# Altium PCB Main.PcbDoc (part 2 of 4)
Units mm, origin at the board's own origin, x right, y up, seen from the top; angles counter-clockwise.
Board outline 172.29 x 85.1 mm, 6 copper layers (Component Side, Ground Plane, Signal Layer 1, Signal Layer 2, Power Plane, Solder Side), stack 1.297 mm thick; 277 components, 256 nets, 1030 pads, 416 vias.
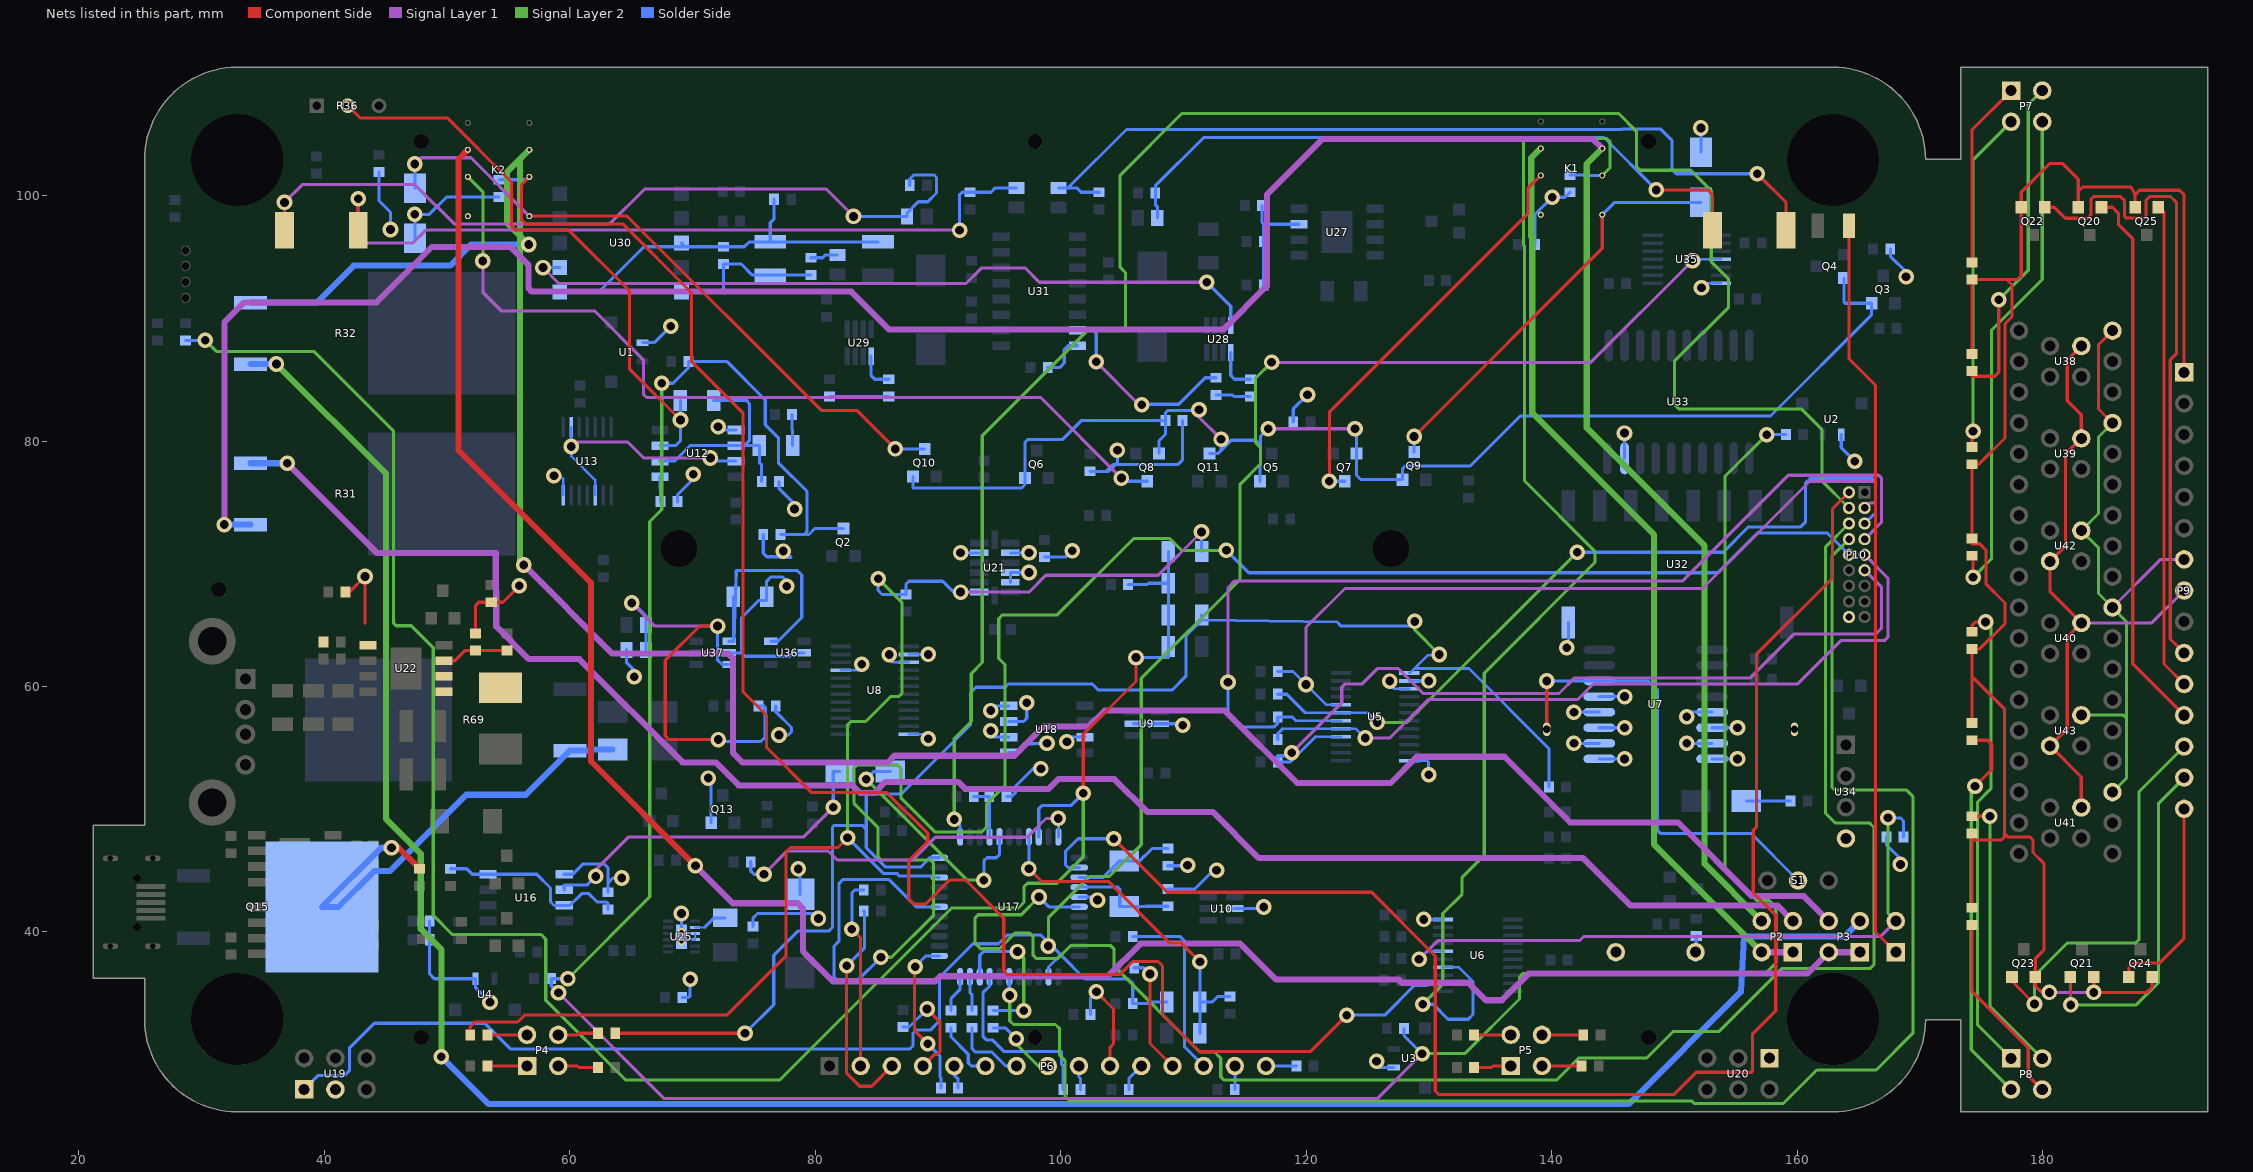
[diagram p6: the nets of this part, all layers, seen from the top]

## Via types
v1: diameter 1.27, hole 0.711, Component Side to Solder Side, tented both sides, 407 vias
v2: diameter 0.66, hole 0.33, Component Side to Solder Side, 8 vias
v3: diameter 1.27, hole 0.711, Component Side to Solder Side, 1 vias

## Nets (pads, with @x,y where several pads share a name; then routed paths per layer and width w, separated by ;. In a path a pad name is that pad's centre, name@x,y a point inside that pad or via, vN(x,y) a via of type N, cw(c..) or ccw(c..) an arc to the next point about the centre after c; other vN are vias at no path point) (continued)
C_EXT_INT: D18.2 P7.4 | length 41.3
  Component Side w0.254: D18.2@174.244,70.66 174.32,70.66 v1(174.32,68.91)
  Signal Layer 2 w0.254: v1(174.32,68.91) 175.819,70.409 175.819,89.027 179.955,93.163 P7.4@179.955,106.01
C_F: P9.7 U38.10 U39.10 U40.10 U41.10 U42.4 U43.4 | length 52.8
  Component Side w0.254: U39.10@185.674,81.469 184.531,82.612 184.531,87.844 U38.10@185.674,88.987
  Signal Layer 1 w0.254: U40.10@185.674,66.432 189.6,70.358 P9.7@191.516,70.358
  Signal Layer 2 w0.254: U43.4@183.134,57.663 186.558,57.663 186.817,57.404 ; U41.10@185.674,51.395 186.817,52.538 186.817,57.404 ; U39.10@185.674,81.469 184.531,80.326 184.531,74.097 U42.4@183.134,72.7 184.531,71.303 184.531,67.575 U40.10@185.674,66.432 186.817,65.289 186.817,57.404
C_FUSE0_LED: D19.2 P8.1 | length 39
  Component Side w0.254: D19.2@174.244,64.468 174.244,64.999 174.498,65.253 v1(175.336,65.253)
  Signal Layer 2 w0.254: v1(175.336,65.253) 175.768,64.821 175.768,51.661 174.676,50.569 174.676,32.439 P8.1@177.415,29.7
C_FUSE1_LED: D20.2 P8.3 | length 31.9
  Component Side w0.254: D20.2@174.244,55.617 175.514,55.617 175.844,55.287 175.844,53.238 v1(174.473,51.867)
  Signal Layer 2 w0.254: v1(174.473,51.867) 174.168,51.562 174.168,30.407 P8.3@177.415,27.16
C_G: P9.8 U38.9 U39.9 U40.9 U41.9 U42.9 U43.9 | length 52.2
  Component Side w0.254: U41.9@183.134,50.145 183.134,52.623 U43.9@180.594,55.163 181.991,56.56 181.991,64.039 U40.9@183.134,65.182 180.594,67.722 U42.9@180.594,70.2 181.864,71.47 181.864,78.949 U39.9@183.134,80.219 183.134,82.144 181.991,83.287 181.991,86.594 U38.9@183.134,87.737
  Signal Layer 1 w0.254: U40.9@183.134,65.182 188.88,65.182 P9.8@191.516,67.818
C_MPU_INT: D16.2 P7.2 | length 27.1
  Component Side w0.254: D16.2@174.244,85.702 174.244,85.28 176.097,85.28 176.415,85.598 v1(176.415,91.503)
  Signal Layer 2 w0.254: v1(176.415,91.503) 178.816,93.904 178.816,107.411 P7.2@179.955,108.55
C_POWER_INT: D15.2 P7.1 | length 15.3
  Component Side w0.254: D15.2@174.244,94.553 174.244,105.379 P7.1@177.415,108.55
C_REMOTE: D22.2 P8.4 | length 15.8
  Component Side w0.254: D22.2@174.244,40.575 174.244,35.128 178.816,30.556 178.816,28.299 P8.4@179.955,27.16
C_RTC_INT: D17.2 P7.3 | length 27.8
  Component Side w0.254: D17.2@174.244,79.511 174.244,80.721 v1(174.32,80.797)
  Signal Layer 2 w0.254: v1(174.32,80.797) 174.32,102.915 P7.3@177.415,106.01
C_S0: P9.15 Q24.2 | length 16.8
  Component Side w0.254: Q24.2@187.01,36.34 187.01,37.084 187.391,37.465 189.484,37.465 191.516,39.497 P9.15@191.516,50.038
C_S1: P9.14 Q21.2 | length 27.8
  Component Side w0.254: Q21.2@182.247,36.34 182.247,34.084 v1(182.27,34.061)
  Signal Layer 2 w0.254: v1(182.27,34.061) 187.604,34.061 189.433,35.89 189.433,50.495 P9.14@191.516,52.578
C_S2: P9.13 Q23.2 | length 32.3
  Component Side w0.254: Q23.2@177.485,36.34 177.485,35.977 v1(179.324,34.138)
  Signal Layer 2 w0.254: v1(179.324,34.138) 179.324,36.424 182.016,39.116 187.579,39.116 187.833,39.37 187.833,51.435 P9.13@191.516,55.118
C_S3: P9.12 Q20.2 | length 44.7
  Component Side w0.254: Q20.2@184.783,99.042 185.674,99.042 186.154,98.562 186.154,97.653 187.325,96.482 187.325,61.849 P9.12@191.516,57.658
C_S4: P9.11 Q25.2 | length 39.7
  Component Side w0.254: Q25.2@189.418,99.042 189.877,98.673 189.877,61.837 P9.11@191.516,60.198
C_S5: P9.10 Q22.2 | length 53.1
  Component Side w0.254: Q22.2@180.147,99.042 180.942,99.042 181.839,98.146 183.642,98.146 183.921,98.425 183.921,99.695 184.15,99.924 186.306,99.924 186.662,99.568 186.662,98.298 186.799,98.161 188.255,98.161 188.392,98.298 188.392,99.593 188.722,99.923 190.398,99.923 190.881,99.44 190.881,87.11 190.385,86.614 190.385,63.869 P9.10@191.516,62.738
C_TRIP_LED: D21.2 P8.2 | length 22.9
  Component Side w0.254: D21.2@174.244,49.426 v1(175.692,49.426)
  Signal Layer 2 w0.254: v1(175.692,49.426) 175.692,33.963 P8.2@179.955,29.7
C_VCC_MCU: D15.1 D16.1 D17.1 D18.1 D19.1 D20.1 D21.1 D22.1 P9.1 Q20.3 Q21.3 Q22.3 Q23.3 Q24.3 Q25.3 | length 141.4
  Component Side w0.254: D22.1@174.244,41.975 174.244,47.625 ; D21.1@174.244,48.026 174.244,47.625 ; D20.1@174.244,57.017 174.244,60.782 ; D16.1@174.244,87.102 D15.1@174.244,93.153 177.052,93.153 ; v1(180.538,35.077) 179.903,35.077 179.385,35.595 Q23.3@179.385,36.34 179.385,37.821 180.086,38.522 180.086,45.593 179.197,46.482 179.197,47.498 178.943,47.752 177.14,47.752 176.886,48.006 ; Q20.3@182.882,99.042 182.882,100.33 ; v1(184.148,35.077) v1@184.148,35.334 ; Q21.3@184.148,36.34 v1@184.148,35.334 ; Q25.3@187.518,99.042 187.518,100.076 ; Q24.3@188.91,36.34 188.91,35.519 188.468,35.077 184.404,35.077 v1@184.148,35.334 ; P9.1@191.516,85.598 191.516,100.051 191.136,100.431 187.873,100.431 187.518,100.076 ; 174.244,47.625 174.371,47.498 176.632,47.498 176.886,47.752 176.886,48.006 ; 174.244,60.782 176.886,58.141 176.886,48.006 ; 174.244,60.782 D19.1@174.244,63.068 174.873,63.068 176.923,65.119 176.923,66.802 175.362,68.363 175.362,71.12 174.854,71.628 174.244,71.628 D18.1@174.244,72.06 D17.1@174.244,78.111 174.783,78.111 176.923,80.251 176.923,89.547 177.495,90.119 177.495,92.71 177.052,93.153 ; 177.052,93.153 177.928,93.153 178.247,93.472 Q22.3@178.247,99.042 178.247,100.272 180.591,102.616 181.587,102.616 182.882,101.321 182.882,100.33 ; 182.882,100.33 183.232,100.68 187.198,100.68 187.518,100.076
  Signal Layer 1 w0.254: v1(180.538,35.077) v1(184.148,35.077)
D: R94.2 U17.34 | length 13.1
  Component Side w0.254: v1(88.138,37.178) 88.087,37.127 88.087,31.953 v1(89.154,30.886)
  Solder Side w0.254: v1(88.138,37.178) 89.012,38.052 U17.34@90.096,38.052 ; v1(89.154,30.886) 90.17,29.87 90.17,28.176 90.232,28.114 R94.2@90.232,27.305
DP: R100.1 U17.30 | length 15.1
  Solder Side w0.254: U17.30@94.196,36.352 94.196,35.598 93.65,35.052 93.65,31.496 93.929,31.217 94.412,31.217 95.352,30.277 100.013,30.277 100.064,30.226 100.064,29.219 100.2,29.083 R100.1@100.2,27.178
E: R93.2 U17.33 | length 3.1
  Solder Side w0.254: R93.2@91.059,33.593 91.059,34.595 91.796,35.332 U17.33@91.796,36.352
EXT_INT: D4.2 R10.1 R108.1 U5.1 U17.44 | length 124.5
  Component Side w0.254: R108.1@63.692,31.75 v1(74.27,31.75)
  Signal Layer 2 w0.254: v1(128.829,65.303) 128.829,64.618 v1(130.835,62.611)
  Solder Side w0.21: U5.1@128.378,61.106 128.448,61.106 128.81,61.468 ; v1@130.759,62.535 129.877,62.535 128.81,61.468 ; 133.248,61.468 128.81,61.468
  Solder Side w0.254: v1(74.27,31.75) 76.606,34.087 76.606,38.1 78.578,40.072 81.084,40.072 81.398,40.386 81.398,48.556 81.534,48.692 83.82,48.692 84.15,48.362 ; U17.44@90.096,46.052 89.332,46.052 88.561,45.281 85.739,45.281 84.15,46.87 84.15,48.362 ; D4.2@111.459,65.828 D4.2@111.459,65.405 ; v1(128.829,65.303) 128.448,64.922 122.834,64.922 122.504,65.253 D4.2@111.459,65.405 ; v1@130.759,62.535 v1(130.835,62.611) ; 133.248,61.468 139.762,54.954 R10.1@139.762,51.816 ; 84.15,48.362 84.15,51.119 84.277,51.246 87.009,51.246 92.634,56.871 92.634,59.49 93.087,59.943 95.441,59.943 95.696,60.198 102.582,60.198 103.073,59.707 109.052,59.707 110.211,60.865 110.211,64.157 D4.2@111.459,65.405
F: R98.1 U17.32 | length 2.8
  Solder Side w0.254: U17.32@92.596,36.352 92.596,35.052 92.773,34.874 R98.1@92.773,33.593
FUSE_POWER: C2.2 Q3.3 Q4.3 Q5.3 Q6.3 Q7.3 Q8.3 Q9.3 Q10.3 Q11.1 | length 109.9
  Signal Layer 1 w0.254: v1(111.252,82.55) 111.252,82.144 111.15,82.042 v1(113.055,80.137) ; v1(116.888,81.001) v1(123.962,81.001)
  Solder Side w0.254: Q10.3@87.95,77.107 87.95,76.2 87.97,76.18 96.809,76.18 97.084,76.454 Q6.3@97.084,76.98 97.084,79.913 97.282,80.112 100.101,80.112 101.651,81.661 C2.2@108.52,81.661 ; Q8.3@107.991,78.976 107.991,80.035 108.52,80.565 C2.2@108.52,81.661 ; v1(111.252,82.55) 111.194,82.492 108.705,82.492 108.52,82.307 C2.2@108.52,81.661 ; Q11.1@112.111,78.976 112.783,78.976 113.055,79.248 ; v1(113.055,80.137) 113.055,79.248 ; Q5.3@116.23,76.726 116.23,77.986 116.251,78.006 116.251,79.685 ; v1(116.888,81.001) 116.251,80.363 116.251,79.685 ; v1(123.962,81.001) 124.089,80.874 Q7.3@124.089,78.976 124.089,77.216 124.452,76.853 Q9.3@127.828,76.853 127.828,77.724 128.082,77.978 133.375,77.978 137.439,82.042 157.81,82.042 166.055,90.287 Q3.3@166.055,91.222 163.895,91.222 163.812,91.305 Q4.3@163.812,93.284 ; 113.055,79.248 113.868,80.061 115.875,80.061 116.251,79.685
G: R99.1 U17.31 | length 12.5
  Signal Layer 2 w0.254: v1(96.469,38.405) 96.977,37.897 v1(96.977,33.593)
  Solder Side w0.254: U17.31@93.396,36.352 93.396,38.1 93.701,38.405 v1(96.469,38.405) ; R99.1@94.488,33.593 v1(96.977,33.593)
GND: BT1.2 C1.1 C2.1 C3.1 C4.1 C5.1 C6.2 C7.1 C9.1 C10.1 C11.1 C14.1 C16.1 C17.2 C18.1 C37.1 C38.1 D6.1 D7.1 K1.7 K2.7 LS1.2 P10.18 Q13.1 R23.1 R24.1 R27.1 R29.1 R33.1 R34.1 R53.1 R63.1 R66.2 R67.1 R68.1 R84.1 R90.1 U1.1 U2.1 U3.1 U4.1 U5.2 U5.3 U5.12 U6.10 U7.5 U7.6 U7.7 U7.8 U7.9 U7.10 U7.11 U7.12 U7.13 U8.2 U8.3 U8.12 U8.21 U9.2 U9.5 U10.2 U12.1 U13.7 U16.1 U17.16 U18.1 U18.2 U18.3 U18.4 U18.7 U19.2 U20.1 U21.2 U21.4 U21.5 U21.12 U22.5 U25.3 U25.4 U25.13 U32.10 U33.9 U34.4 U35.7 U36.2 U37.2 | length 214.2
  Component Side w0.254: R68.1@41.721,67.691 42.037,67.691 v1(43.307,68.961) 43.307,65.151 ; C14.1@52.324,64.327 52.324,66.61 52.578,66.864 R67.1@53.594,66.864 54.556,66.864 55.88,68.188 v1(55.88,68.199)
  Solder Side w0.175: U25.13@69.088,39.37 69.897,39.37 69.901,39.374 U25.4@70.18,39.374 ; U25.4@70.188,39.374 U25.4@70.18,39.374 ; U25.3@70.188,39.874 70.18,39.874 U25.4@70.18,39.374
  Solder Side w0.21: v1(58.7,77.171) 59.208,77.171 59.462,76.917 U13.7@59.462,75.584 ; U8.21@82.061,61.315 83.521,61.315 v1@83.775,61.569 ; v1(86.024,62.6) 86.024,62.23 86.289,61.965 U8.3@87.611,61.965 ; U8.12@87.611,56.115 88.817,56.115 v1(89.198,55.734) ; U8.2@87.611,62.615 v1(89.198,62.615) ; v1(126.791,60.441) 126.791,60.198 127.183,59.806 U5.3@128.378,59.806 ; U5.12@128.378,53.956 129.838,53.956 129.965,53.829 ; v1(152.191,92.482) 152.572,92.863 U35.7@153.778,92.863
  Solder Side w0.254: R63.1@44.45,101.916 44.45,99.568 45.39,98.628 v1(45.39,97.231) ; D6.1@47.371,96.502 v1(47.371,98.464) 48.553,98.464 49.973,99.884 R34.1@54.229,99.884 ; C5.1@48.579,40.894 C7.1@48.579,39.37 48.579,36.576 48.96,36.195 U4.1@52.324,36.195 52.324,35.448 v1(53.492,34.28) ; U16.1@59.54,44.704 60.241,44.704 61.087,45.55 62.781,45.55 63.119,45.212 63.119,44.018 ; C6.2@63.119,43.245 63.119,44.018 ; v1(64.222,44.399) 63.5,44.399 63.119,44.018 ; R90.1@64.605,62.992 64.605,61.969 65.38,61.195 65.38,60.673 65.253,60.546 v1(65.253,60.8) ; U1.1@65.913,88.011 66.863,88.011 v1(68.209,89.357) ; C4.1@68.772,75.057 68.772,75.627 70.053,76.908 v1(70.053,77.303) ; U25.13@69.088,39.37 U25.13@69.088,39.624 v1(69.088,41.504) ; C16.1@69.153,34.671 69.672,34.671 69.799,34.798 v1(69.799,36.155) ; v1(71.272,52.537) 71.506,52.304 Q13.1@71.506,48.895 ; v1(72.075,81.153) 72.075,81.026 72.202,80.899 U12.1@73.537,80.899 ; U37.2@72.979,62.738 73.985,62.738 ; C18.1@74.93,40.451 74.93,41.148 75.286,41.504 79.843,41.504 v1(80.25,41.097) ; C1.1@75.754,72.39 75.754,70.862 76.048,70.569 v1@77.68,70.569 ; C38.1@76.773,58.42 76.773,57.937 78.054,56.656 78.054,56.301 77.8,56.047 v1(77.038,56.047) ; C3.1@77.027,76.708 77.027,76.138 78.308,74.857 v1(78.308,74.462) ; v1(77.394,71.033) 77.394,70.855 v1@77.68,70.569 ; v1(77.677,68.16) 77.677,68.58 77.335,68.922 76.368,68.922 76.026,68.58 C37.1@76.026,67.31 76.026,67.005 75.387,67.005 73.985,65.603 73.985,62.738 ; v1(78.613,45.14) 78.74,45.013 C17.2@78.74,43.078 ; U36.2@79.075,62.738 78.181,62.738 77.912,62.469 74.254,62.469 73.985,62.738 ; v1@83.775,61.569 v1(83.775,61.823) ; v1(91.833,70.891) U21.12@93.345,70.891 ; v1(94.296,56.388) 94.296,56.134 94.55,55.88 U18.2@95.758,55.88 ; v1(94.296,58.039) 94.677,58.42 U18.4@95.758,58.42 ; R53.1@95.569,51.054 96.001,51.054 96.291,51.344 96.291,51.858 97.733,53.3 v1(98.374,53.3) ; U18.1@95.758,54.61 96.596,54.61 96.85,54.864 96.85,55.154 97.028,55.332 97.815,55.332 97.855,55.372 v1(98.871,55.372) ; U18.3@95.758,57.15 96.966,57.15 97.22,57.404 v1(97.22,58.674) ; U21.5@95.89,68.491 95.885,68.491 95.885,69.291 U21.4@95.89,69.291 v1(97.402,69.291) ; U21.2@95.89,70.891 v1(97.402,70.891) ; C11.1@98.679,70.547 100.403,70.547 v1(100.925,71.069) ; v1(100.496,55.499) 100.496,55.753 100.623,55.88 U18.7@101.958,55.88 ; U17.16@101.496,42.852 102.729,42.852 v1(102.983,42.598) ; R29.1@102.362,77.532 103.694,77.532 ; v1(104.608,79.248) 104.608,78.25 104.437,78.08 ; U9.5@105.918,56.962 U9.2@108.068,56.962 109.809,56.962 v1(109.936,56.835) ; C10.1@108.712,43.499 110.896,43.499 112.431,45.034 v1(112.685,45.034) ; C9.1@108.712,45.401 109.839,45.401 109.878,45.441 v1(110.323,45.441) ; C2.1@109.92,81.661 109.92,78.486 109.514,78.08 104.437,78.08 ; U10.2@114.164,41.91 115.905,41.91 116.032,42.037 v1(116.54,42.037) ; R27.1@118.934,81.534 118.934,82.623 v1(120.091,83.78) ; v1(125.72,29.464) 125.72,29.21 125.974,28.956 U3.1@127.127,28.956 ; U5.2@128.378,60.456 v1(129.965,60.456) ; v1(129.573,41.025) U6.10@131.135,41.025 ; v1(129.965,52.813) 129.965,53.829 ; R84.1@138.622,96.012 138.622,98.45 v1(140.03,99.858) 141.071,99.858 R33.1@141.478,100.265 ; v1(141.224,63.165) 141.351,63.292 U32.10@141.351,65.227 ; v1(141.801,55.372) U7.10@143.863,55.372 ; v1(141.801,57.912) U7.12@143.863,57.912 ; U7.9@143.863,54.102 v1(145.925,54.102) ; U7.11@143.863,56.642 v1(145.925,56.642) ; U7.13@143.863,59.182 v1(145.925,59.182) ; U33.9@145.923,78.585 v1(145.923,80.647) ; v1(151.001,55.372) U7.7@153.063,55.372 ; v1(151.001,57.531) 151.382,57.912 U7.5@153.063,57.912 ; D7.1@152.146,103.541 v1(152.146,105.503) ; U7.8@153.063,54.102 v1(155.125,54.102) ; U7.6@153.063,56.642 v1(155.125,56.642) ; U2.1@163.576,80.518 163.576,79.441 v1(164.668,78.349) ; R24.1@167.256,47.752 167.256,47.115 168.402,45.969 v1(168.402,45.506) ; R23.1@167.578,95.631 167.578,95.061 168.859,93.78 v1(168.859,93.385) ; v1@77.68,70.569 77.724,70.525 78.029,70.525 77.985,70.569 v1@77.68,70.569 ; 103.694,77.532 104.242,78.08 104.437,78.08 ; 103.694,77.532 103.89,77.532 104.437,78.08
  other v2: 69.088,39.243 69.088,40.005
HG_POWER: C1.2 Q2.1 R3.2 R4.2 R5.2 R6.2 | length 242.4
  Signal Layer 1 w0.254: v1(59.07,35.04) 67.682,26.428 125.767,26.428 v1(129.427,30.088)
  Signal Layer 2 w0.254: v1(59.842,36.195) 66.511,42.864 66.511,73.447 67.488,74.424 v1(67.488,84.709) ; v1(129.427,30.088) 132.907,30.088 137.363,34.544 137.363,36.322 137.643,36.601 157.378,36.601 158.242,37.465 158.242,42.037 157.734,42.545 156.718,42.545 154.102,45.161 154.102,77.114 v1(157.505,80.518)
  Solder Side w0.254: v1(59.07,35.04) 58.485,35.625 R6.2@58.485,36.195 v1(59.842,36.195) ; v1(67.488,84.709) 68.402,84.709 69.661,85.968 R3.2@69.661,86.487 72.771,86.487 75.921,83.337 75.921,81.331 76.987,80.264 76.987,78.232 79.324,75.895 79.324,72.644 79.07,72.39 ; C1.2@77.154,72.39 79.07,72.39 ; Q2.1@82.296,72.88 79.967,72.88 79.477,72.39 79.07,72.39 ; R4.2@127.954,32.131 127.954,31.561 v1(129.427,30.088) ; v1(157.505,80.518) R5.2@159.066,80.518
INDICATOR_SW_OUT: U12.3 U13.3 U13.9 | length 20.6
  Signal Layer 1 w0.254: v1(60.112,79.553) 60.493,79.934 64.694,79.934 66.015,78.613 v1(71.45,78.613)
  Solder Side w0.21: U13.9@60.112,81.134 v1(60.112,79.553) 60.112,78.775 62.062,76.825 U13.3@62.062,75.584
  Solder Side w0.254: v1(71.45,78.613) 71.704,78.359 U12.3@73.537,78.359
KEY_INT: D11.1 D12.1 R55.1 U17.8 | length 28.1
  Component Side w0.254: v1(97.396,45.149) 98.423,44.122 103.858,44.122 108.886,39.094 109.804,39.094 v1(111.332,37.566)
  Solder Side w0.254: v1(97.396,45.149) U17.8@97.396,47.752 ; D12.1@111.332,31.75 D11.1@111.332,34.29 ; v1(111.332,37.566) D11.1@111.332,34.29 ; R55.1@113.792,34.736 112.765,34.736 112.319,34.29 D11.1@111.332,34.29
LIN: U28.8 U30.7 | length 61.3
  Signal Layer 1 w0.254: v1(57.81,94.132) 59.106,92.837 92.278,92.837 93.548,94.107 97.079,94.107 98.247,92.939 v1(111.887,92.939)
  Solder Side w0.254: v1(57.81,94.132) 57.817,94.139 U30.7@59.182,94.139 ; v1(111.887,92.939) 113.837,90.989 U28.8@113.837,89.408
LOUT: R79.1 U31.7 | length 16.1
  Signal Layer 1 w0.254: v1(102.88,86.451) 106.366,82.966 v1(106.588,82.966)
  Solder Side w0.254: U31.7@101.35,89.027 102.616,89.027 102.88,88.763 v1(102.88,86.451) ; v1(106.588,82.966) 106.622,83 109.605,83 111.76,85.155 R79.1@112.649,85.155
MCU_POWER_EN: R58.1 U17.11 | length 29.9
  Signal Layer 1 w0.254: v1(75.819,44.704) 77.724,46.609 81.026,46.609 81.763,45.872 87.935,45.872 89.777,47.715 97.257,47.715 98.793,49.251 v1(99.796,49.251)
  Solder Side w0.254: R58.1@74.741,45.72 74.741,44.958 74.995,44.704 v1(75.819,44.704) ; U17.11@99.796,47.752 v1(99.796,49.251)
MOD: D11.2 R57.2 U17.24 U19.1 U35.4 | length 183.1
  Signal Layer 1 w0.254: v1(117.17,86.411) 143.185,86.411 v1(151.46,94.686)
  Signal Layer 2 w0.254: v1(98.984,38.862) 98.984,41.148 102.364,44.528 103.964,44.528 106.553,47.117 106.553,60.662 114.605,68.713 114.605,76.479 116.251,78.125 116.251,79.477 115.859,79.868 115.859,85.1 v1(117.17,86.411)
  Solder Side w0.21: v1@151.587,94.813 U35.4@153.778,94.813
  Solder Side w0.254: U19.1@38.354,27.178 39.497,28.321 41.656,28.321 42.037,28.702 42.037,30.531 44.069,32.563 53.061,32.563 55.143,30.48 87.706,30.48 87.96,30.734 87.96,31.75 88.214,32.004 89.357,32.004 90.119,32.766 90.119,36.322 92.837,39.04 94.92,39.04 95.631,39.751 98.374,39.751 v1@99.123,39.002 ; v1(98.984,38.862) v1@99.123,39.002 ; U17.24@98.996,36.352 98.996,37.147 99.987,38.138 ; D11.2@108.632,34.29 107.29,34.29 107.163,34.163 R57.2@105.856,34.163 105.856,35.814 105.5,36.17 101.956,36.17 99.987,38.138 ; v1(151.46,94.686) v1@151.587,94.813 ; v1@99.123,39.002 99.987,38.138
MPU_INT: D2.2 R61.1 R106.2 U17.42 U21.8 | length 110.3
  Component Side w0.254: R106.2@51.878,31.623 51.878,32.258 52.284,32.664 55.753,32.664 56.34,33.252 72.825,33.252 77.597,38.024 77.597,46.507 77.978,46.888 81.839,46.888 v1(82.626,47.676)
  Signal Layer 1 w0.254: v1(91.833,67.691) 97.409,67.691 98.781,69.063 107.925,69.063 v1(111.455,72.593)
  Signal Layer 2 w0.254: v1(82.626,47.676) 82.626,56.896 82.88,57.15 84.099,57.15 86.131,59.182 86.792,59.182 87.046,59.436 87.046,66.853 v1(85.115,68.783)
  Solder Side w0.254: v1(82.626,47.676) 85.529,44.773 86.633,44.773 86.854,44.552 89.637,44.552 89.637,44.452 U17.42@90.096,44.452 ; v1(85.115,68.783) 85.115,67.818 85.431,67.502 R61.1@87.376,67.502 87.376,68.326 87.63,68.58 90.373,68.58 91.262,67.691 v1(91.833,67.691) U21.8@93.345,67.691 ; v1(111.455,72.593) 111.459,72.589 D2.2@111.459,70.993
NetBT1_1: BT1.1 S1.2 U7.14 | length 37.9
  Component Side w0.254: BT1.1@139.582,56.515 v1(139.582,60.452)
  Solder Side w0.254: v1(139.582,60.452) U7.14@143.863,60.452 147.879,60.452 148.59,59.741 148.59,48.285 148.844,48.031 156.225,48.031 S1.2@160.06,44.196
NetC3_2: C3.2 D8.2 D9.1 U12.2 U12.6 | length 18.2
  Solder Side w0.254: U12.6@67.337,78.359 68.529,78.359 69.799,79.629 U12.2@73.537,79.629 74.244,79.629 ; D8.2@71.708,83.312 74.371,83.312 74.625,83.058 74.625,80.01 74.244,79.629 ; C3.2@75.627,76.708 75.627,78.054 75.438,78.243 D9.1@75.438,79.629 74.244,79.629
NetC4_2: C4.2 U12.5 | length 2
  Solder Side w0.254: U12.5@67.337,77.089 67.337,76.083 67.372,76.048 C4.2@67.372,75.057
NetC6_1: C6.1 R44.2 U16.3 U16.8 | length 15.9
  Solder Side w0.254: R44.2@50.292,45.15 51.587,45.15 52.033,44.704 U16.8@53.34,44.704 57.298,44.704 58.418,43.583 58.418,42.458 58.713,42.164 U16.3@59.54,42.164 59.995,42.164 60.96,43.129 61.544,43.129 62.23,42.443 62.992,42.443 63.119,42.316 C6.1@63.119,41.845
NetC8_1: C8.1 R53.2 U17.4 | length 4.7
  Solder Side w0.254: C8.1@92.902,51.054 R53.2@93.942,51.054 ; R53.2@94.169,51.054 R53.2@93.942,51.054 ; U17.4@94.196,47.752 94.196,50.8 R53.2@93.942,51.054
NetC9_2: C9.2 U17.14 Y1.1 | length 8.2
  Solder Side w0.254: U17.14@101.496,44.452 103.46,44.452 104.8,45.792 Y1.1@105.156,45.792 106.426,45.792 107.435,46.801 C9.2@108.712,46.801
NetC10_2: C10.2 U17.15 Y1.2 | length 8.7
  Solder Side w0.254: U17.15@101.496,43.652 104.633,43.652 104.8,43.485 104.8,42.092 Y1.2@105.156,42.092 106.909,42.092 106.916,42.099 C10.2@108.712,42.099
NetC14_2: C14.2 R64.1 U22.3 | length 5.4
  Component Side w0.254: U22.3@49.757,62.103 50.622,62.103 51.446,62.927 C14.2@52.324,62.927 53.569,62.927 R64.1@54.864,62.927
NetC19_1: C19.1 R79.2 | length 2.8
  Solder Side w0.254: R79.2@112.649,83.755 113.97,83.755 114.097,83.628 C19.1@115.443,83.628
NetC19_2: C19.2 U28.1 | length 3.6
  Solder Side w0.254: U28.1@113.837,87.208 113.837,85.344 114.153,85.028 C19.2@115.443,85.028
NetC20_1: C20.1 R47.1 R48.2 U27.7 | length 9.5
  Solder Side w0.254: R48.2@116.397,99.187 116.397,97.79 116.524,97.663 116.524,97.347 ; C20.1@116.524,92.71 R47.1@116.524,96.266 116.524,97.347 ; U27.7@119.403,97.663 116.84,97.663 116.524,97.347
NetC23_1: C23.1 R81.2 | length 4.8
  Solder Side w0.254: R81.2@81.153,83.628 83.095,83.628 C23.1@85.979,83.628
NetC23_2: C23.2 U29.1 | length 3.1
  Solder Side w0.254: U29.1@84.541,86.911 84.541,85.323 84.836,85.028 C23.2@85.979,85.028
NetC24_2: C24.2 L3.2 LS2.2 | length 54.5
  Component Side w0.254: v1(148.514,100.457) 152.702,100.457 153.083,100.076 LS2.2@153.083,97.169
  Solder Side w0.254: L3.2@107.861,98.171 107.861,99.085 107.696,99.25 C24.2@107.696,100.203 107.696,100.787 111.633,104.724 144.247,104.724 v1(148.514,100.457)
NetC25_2: C25.2 L6.2 LS2.1 | length 70.1
  Component Side w0.254: v1(156.746,101.778) 159.083,99.441 LS2.1@159.083,97.169
  Solder Side w0.254: L6.2@99.822,100.622 100.584,100.622 ; C25.2@103.124,100.268 101.649,100.268 101.295,100.622 100.584,100.622 ; v1(156.746,101.778) 150.114,101.778 149.784,102.108 149.784,104.496 148.869,105.41 145.72,105.41 145.694,105.385 105.347,105.385 100.584,100.622
NetC26_1: C26.1 C27.1 C28.1 L10.2 U30.3 U30.6 | length 31.7
  Solder Side w0.254: U30.6@59.182,92.139 62.358,92.139 66.042,95.823 U30.3@69.404,95.823 ; U30.3@69.088,96.139 U30.3@69.404,95.823 ; L10.2@76.643,99.695 76.643,98.106 76.327,97.79 C28.1@76.327,96.219 ; C27.1@85.09,96.219 C28.1@76.327,96.219 ; U30.3@69.404,95.823 C26.1@72.517,95.823 74.219,95.823 74.615,96.219 C28.1@76.327,96.219
NetC26_2: C26.2 C28.2 R85.2 U30.5 | length 13
  Solder Side w0.254: U30.5@69.088,92.139 72.2,92.139 72.517,92.456 C26.2@72.517,94.423 73.965,94.423 74.869,93.519 C28.2@76.327,93.519 78.974,93.519 78.989,93.534 R85.2@79.629,93.534
NetC29_2: C29.2 L8.2 LS3.1 | length 63.2
  Component Side w0.254: LS3.1@42.751,97.169 v1(42.751,99.746)
  Signal Layer 1 w0.254: v1(42.751,99.746) 42.751,96.52 43.132,96.139 47.219,96.139 48.259,97.179 91.751,97.179 v1(91.752,97.18)
  Solder Side w0.254: v1(91.752,97.18) 91.752,100.076 91.944,100.268 C29.2@92.583,100.268 94.31,100.268 94.664,100.622 L8.2@96.393,100.622
NetC30_2: C30.2 L9.2 LS3.2 | length 64.5
  Component Side w0.254: LS3.2@36.751,97.169 36.751,99.441 v1(36.754,99.441)
  Signal Layer 1 w0.254: v1(36.754,99.441) 38.202,100.889 47.371,100.889 50.573,97.687 63.245,97.687 66.091,100.533 80.874,100.533 v1(83.109,98.298)
  Solder Side w0.254: v1(83.109,98.298) L9.2@87.465,98.298 87.465,98.565 88.392,99.492 89.162,99.492 89.873,100.203 89.873,101.473 89.677,101.669 88.015,101.669 87.692,101.346 C30.2@87.692,100.838
NetC36_2: C36.2 U31.8 | length 3.8
  Solder Side w0.254: C36.2@98.933,85.979 99.898,85.979 100.279,86.36 100.279,87.452 100.584,87.757 U31.8@101.35,87.757
NetC37_2: C37.2 U36.5 U37.1 | length 22
  Solder Side w0.254: U37.1@72.979,63.688 U37.1@73.326,63.688 ; C37.2@73.326,67.31 U37.1@73.326,63.688 ; U36.5@76.373,63.688 76.962,63.688 78.892,65.618 78.892,69.088 78.537,69.444 73.558,69.444 73.49,67.305 73.376,63.688 U37.1@73.326,63.688
NetC38_2: C38.2 R80.1 R90.2 U37.3 | length 39.1
  Component Side w0.254: v1(72.034,64.922) 70.561,64.922 67.767,62.128 67.767,55.982 68.072,55.677 v1(72.085,55.677)
  Signal Layer 1 w0.254: v1(65.049,66.802) 66.929,64.922 v1(72.034,64.922)
  Solder Side w0.254: v1(65.049,66.802) 65.189,66.802 66.205,65.786 R80.1@66.205,65.024 R90.2@66.205,62.992 ; v1(72.034,64.922) 72.034,62.144 72.39,61.788 U37.3@72.979,61.788 ; v1(72.085,55.677) 72.238,55.524 75.565,55.524 75.921,55.88 75.921,58.293 75.794,58.42 C38.2@75.373,58.42
NetD1_1: D1.1 D2.1 D3.1 D4.1 R11.1 R43.2 U17.9 | length 170.3
  Component Side w0.254: v1(101.829,51.308) 101.829,56.11 106.121,60.403 v1(106.121,62.355)
  Signal Layer 2 w0.254: v1(30.302,88.2) 31.202,87.3 39.139,87.3 45.641,80.797 45.641,65.151 45.846,64.946 47.078,64.946 48.87,63.154 48.87,41.351 50.419,39.802 57.658,39.802 58.039,39.421 58.039,34.442 64.541,27.94 77.089,27.94 91.11,41.961 96.545,41.961 97.003,42.418 97.003,43.688 97.282,43.967 99.67,43.967 101.829,46.126 v1(101.829,51.308)
  Solder Side w0.254: R43.2@28.702,88.2 v1(30.302,88.2) ; U17.9@98.196,47.752 98.196,50.038 98.45,50.292 100.813,50.292 v1(101.829,51.308) ; R11.1@105.475,68.326 107.061,68.326 107.146,68.411 D1.1@108.759,68.411 ; v1(106.121,62.355) 108.759,62.355 D3.1@108.759,63.246 D4.1@108.759,65.828 D1.1@108.759,68.411 ; D2.1@108.759,70.993 D1.1@108.759,68.411
NetD5_2: D5.2 R17.2 | length 3.6
  Solder Side w0.254: D5.2@155.847,50.673 R17.2@159.447,50.673
NetD6_2: D6.2 K2.8 Q10.1 | length 53.5
  Component Side w0.254: K2.8@56.697,98.318 64.648,98.318 80.467,82.499 83.37,82.499 v1(86.512,79.357)
  Signal Layer 1 w0.254: v1(47.371,102.565) 47.879,103.073 51.942,103.073 K2.8@56.697,98.318
  Solder Side w0.254: D6.2@47.371,100.602 v1(47.371,102.565) ; v1(86.512,79.357) Q10.1@88.9,79.357
NetD7_2: D7.2 K1.8 Q9.1 | length 34.1
  Component Side w0.254: v1(128.778,80.366) 144.109,95.697 K1.8@144.109,98.435
  Solder Side w0.254: Q9.1@128.778,79.103 v1(128.778,80.366) ; K1.8@144.109,98.435 145.115,99.441 D7.2@152.146,99.441
NetD8_1: D8.1 R36.3 U12.7 | length 48.7
  Component Side w0.254: R36.3@41.91,107.315 42.901,106.324 50.013,106.324 55.238,101.099 55.238,97.536 55.595,97.179 59.92,97.179 64.872,92.227 64.872,85.852 v1(69.012,81.712)
  Solder Side w0.254: U12.7@67.337,79.629 68.627,79.629 69.008,80.01 v1@69.008,81.712 ; D8.1@69.008,83.312 v1@69.008,81.712 ; v1(69.012,81.712) v1@69.008,81.712
NetD9_2: D9.2 R40.1 | length 2.6
  Solder Side w0.254: R40.1@78.108,82.169 78.108,80.904 78.138,80.874 D9.2@78.138,79.629
NetD10_1: D10.1 U17.5 | length 19.7
  Signal Layer 2 w0.254: v1(84.15,52.451) 92.38,44.221 v1(93.726,44.221)
  Solder Side w0.254: v1(84.15,52.451) 84.785,53.086 D10.1@86.106,53.086 ; v1(93.726,44.221) 93.726,45.796 93.98,46.05 94.742,46.05 94.996,46.304 U17.5@94.996,47.752
NetD10_2: D10.2 U16.2 | length 28.7
  Signal Layer 1 w0.254: v1(62.103,44.526) 62.103,45.06 64.77,47.727 79.019,47.727 v1(81.458,50.165)
  Solder Side w0.254: U16.2@59.54,43.434 59.54,43.84 61.417,43.84 v1(62.103,44.526) ; v1(81.458,50.165) 81.458,53.086 D10.2@82.006,53.086
NetD13_1: D13.1 Q15.1 R69.2 R71.2 | length 39.7
  Component Side w0.5: v1(45.466,46.863) 46.039,46.863 R71.2@47.752,45.15
  Solder Side w0.5: v1(45.466,46.863) 44.621,46.863 Q15.1@39.795,42.037 41.148,42.037 44.069,44.958 45.339,44.958 51.562,51.181 56.41,51.181 R69.2@60.006,54.777 61.697,54.777 61.784,54.864 D13.1@63.482,54.864
NetK1_1: K1.1 P2.1 P2.2 | length 76.1
  Signal Layer 1 w0.5: P2.2@157.099,38.354 P2.1@159.639,38.354
  Signal Layer 2 w0.5: K1.1@139.101,103.835 138.328,103.062 138.328,96.661 138.405,96.585 138.405,82.296 148.311,72.39 148.311,47.142 P2.2@157.099,38.354
NetK1_2: K1.2 Q7.1 | length 33.3
  Component Side w0.254: v1(121.877,76.726) 121.877,82.348 138.049,98.521 138.049,100.583 K1.2@139.101,101.635
  Solder Side w0.254: v1(121.877,76.726) Q7.1@123.139,76.726
NetK1_4: K1.4 P2.4 R31.1 | length 217.8
  Signal Layer 1 w0.5: v1(31.852,73.192) 31.852,89.662 33.477,91.288 44.247,91.288 48.768,95.809 55.143,95.809 56.642,94.31 56.642,92.431 56.896,92.177 82.931,92.177 86.03,89.078 113.233,89.078 116.789,92.634 116.789,100.076 121.31,104.597 143.347,104.597 K1.4@144.109,103.835
  Signal Layer 2 w0.5: K1.4@144.109,103.835 142.847,102.573 142.847,81.079 152.451,71.476 152.451,45.542 P2.4@157.099,40.894
  Solder Side w0.5: v1(31.852,73.192) R31.1@33.974,73.192
NetK1_5: K1.5 R33.2 U6.4 | length 101.8
  Signal Layer 2 w0.254: v1(129.489,34.112) 131.115,35.738 131.115,41.504 132.693,43.082 132.693,44.45 134.493,46.25 134.493,61.087 143.51,70.104 143.51,71.018 137.77,76.759 137.77,95.885 137.693,95.961 137.693,104.394 137.947,104.648 144.501,104.648 144.755,104.394 144.755,102.281 K1.5@144.109,101.635
  Solder Side w0.21: U6.4@131.135,37.125 132.42,37.125 133.579,35.966
  Solder Side w0.254: v1(129.489,34.112) 130.327,34.112 131.547,32.893 133.198,32.893 133.579,33.274 133.579,35.966 ; R33.2@141.478,101.665 142.773,101.665 142.803,101.635 K1.5@144.109,101.635
NetK2_1: K2.1 P3.1 P3.2 | length 172.2
  Component Side w0.5: K2.1@51.689,103.718 50.927,102.956 50.927,79.248 61.722,68.453 61.722,53.899 v1(70.231,45.39)
  Signal Layer 1 w0.5: v1(70.231,45.39) 73.275,42.346 78.548,42.346 78.983,41.91 78.983,38.441 81.432,35.992 89.764,35.992 90.17,36.398 103.835,36.398 106.494,39.057 114.605,39.057 117.543,36.119 127.537,36.119 127.787,35.869 133.194,35.869 134.623,34.439 135.934,34.439 138.106,36.612 160.818,36.612 P3.2@162.56,38.354 P3.1@165.1,38.354
NetK2_2: K2.2 Q8.1 | length 72.1
  Signal Layer 1 w0.254: v1(52.908,94.666) 52.908,92.107 54.413,90.602 62.001,90.602 65.989,86.614 65.989,83.82 66.269,83.541 98.374,83.541 v1(104.935,76.98)
  Signal Layer 2 w0.254: K2.2@51.689,101.518 52.908,100.299 v1(52.908,94.666)
  Solder Side w0.254: v1(104.935,76.98) 105.189,76.726 Q8.1@107.041,76.726
NetK2_4: K2.4 P3.4 R32.2 | length 195.1
  Signal Layer 1 w0.5: v1(56.236,69.901) 63.449,62.687 72.898,62.687 73.279,62.306 73.279,54.61 74.088,53.801 85.883,53.801 86.438,54.356 96.204,54.356 98.596,56.748 102.264,56.748 103.556,58.039 113.36,58.039 119.261,52.138 126.865,52.138 129.007,54.28 136.144,54.28 141.503,48.92 150.292,48.92 156.286,42.926 160.528,42.926 P3.4@162.56,40.894
  Signal Layer 2 w0.5: v1(56.236,69.901) 55.931,70.206 55.931,96.723 ; v1(56.642,96.012) 55.931,96.723 ; K2.4@56.697,103.718 55.931,102.952 ; 55.931,96.723 55.931,102.952 ; 55.931,96.723 54.864,97.79 54.864,101.885 55.931,102.952
  Solder Side w0.5: R32.2@33.974,91.273 39.381,91.273 42.393,94.285 50.249,94.285 51.976,96.012 v1(56.642,96.012)
NetK2_5: K2.5 R34.2 U6.2 | length 142.5
  Component Side w0.254: K2.5@56.697,101.518 56.058,100.879 56.058,98.017 56.388,97.687 64.314,97.687 69.901,92.1 69.901,86.487 74.092,82.296 74.092,59.588 76.022,57.658 76.022,55.042 79.705,51.359 85.827,51.359 89.154,48.031 89.154,47.371 87.605,45.822 87.605,42.672 88.011,42.266 88.976,42.266 90.957,44.247 92.227,44.247 95.352,41.123 95.352,36.83 95.656,36.525 104.8,36.525 105.867,37.592 107.928,37.592 108.28,37.24 108.28,33.249 111.252,30.277 120.345,30.277 v1(123.292,33.223)
  Solder Side w0.21: 128.803,35.636 129.718,35.636 U6.2@131.135,35.825
  Solder Side w0.254: R34.2@54.229,101.284 56.463,101.284 K2.5@56.697,101.518 ; v1(123.292,33.223) 126.39,33.223 128.803,35.636
NetL1_2: L1.2 U22.1 U22.2
NetL2_1: L2.1 U25.2 | length 2.8
  Solder Side w0.175: U25.2@70.188,40.374 70.994,40.374
  Solder Side w0.254: 70.994,40.374 71.771,41.151 L2.1@72.644,41.151
NetL7_2: L7.2 R85.1 | length 2.3
  Solder Side w0.254: R85.1@79.629,94.934 80.594,94.934 80.821,95.161 L7.2@81.788,95.161
NetLS1_1: LS1.1 R2.1 | length 1.4
  Solder Side w0.254: LS1.1@151.713,38.354 151.765,38.406 R2.1@151.765,39.686
NetP1_1: P1.1 U11.2 | length 60.8
  Component Side w0.254: U11.2@164.211,97.536 164.211,86.69 166.37,84.531 166.37,40.005 P1.1@168.021,38.354
NetP1_2: P1.2 R24.2 U6.6 | length 53.7
  Signal Layer 1 w0.254: v1(129.184,37.77) 130.714,39.299 142.252,39.299 142.577,39.624 166.751,39.624 P1.2@168.021,40.894
  Signal Layer 2 w0.254: v1(167.386,49.301) 167.386,41.529 P1.2@168.021,40.894
  Solder Side w0.21: v1(129.184,37.77) 129.84,38.425 U6.6@131.135,38.425
  Solder Side w0.254: v1(167.386,49.301) 168.402,49.301 168.656,49.047 R24.2@168.656,47.752
NetP2_3: P2.3 R31.2 | length 146
  Signal Layer 1 w0.5: v1(36.972,78.192) 44.298,70.866 53.964,70.866 54,64.897 56.667,62.23 60.782,62.23 69.19,53.823 71.882,53.823 73.762,51.943 83.011,51.943 83.642,51.312 84.785,51.312 85.704,52.231 91.634,52.231 92.213,51.653 99.005,51.653 99.803,52.451 104.369,52.451 107.036,49.784 112.37,49.784 116.136,46.018 142.552,46.018 146.406,42.164 158.369,42.164 P2.3@159.639,40.894
  Solder Side w0.5: R31.2@33.974,78.192 v1(36.972,78.192)
NetP3_3: P3.3 R32.1 | length 189.8
  Signal Layer 2 w0.5: v1(36.093,86.273) 45.01,77.356 45.01,49.224 47.854,46.38 47.854,40.259 49.53,38.583 v1(49.53,29.845)
  Solder Side w0.5: R32.1@33.974,86.273 v1(36.093,86.273) ; v1(49.53,29.845) 53.391,25.984 146.253,25.984 155.397,35.128 155.651,39.624 163.83,39.624 P3.3@165.1,40.894
NetP4_1: P4.1 R105.1 | length 3.2
  Component Side w0.254: R105.1@53.278,29.083 P4.1@56.515,29.083
NetP4_2: P4.2 R106.1 | length 3.2
  Component Side w0.254: R106.1@53.278,31.623 P4.2@56.515,31.623
NetP4_3: P4.3 R107.2 | length 3.3
  Component Side w0.254: P4.3@59.055,29.083 60.604,29.083 60.731,28.956 R107.2@62.292,28.956
NetP4_4: P4.4 R108.2 | length 3.3
  Component Side w0.254: P4.4@59.055,31.623 60.604,31.623 60.731,31.75 R108.2@62.292,31.75
NetP5_1: P5.1 R109.1 | length 3
  Component Side w0.254: R109.1@133.669,28.956 135.077,28.956 135.204,29.083 P5.1@136.652,29.083
NetP5_2: P5.2 R111.2 | length 3
  Component Side w0.254: R111.2@133.669,31.623 P5.2@136.652,31.623
NetP5_3: P5.3 R110.2 | length 3.2
  Component Side w0.254: P5.3@139.192,29.083 R110.2@142.429,29.083
NetP5_4: P5.4 R112.2 | length 3.4
  Component Side w0.254: P5.4@139.192,31.623 R112.2@142.556,31.623
NetP6_2: P6.2 R97.1 | length 15.5
  Component Side w0.254: v1(82.974,40.234) 83.693,39.515 P6.2@83.693,29.083
  Solder Side w0.254: v1(82.974,40.234) 82.974,43.18 83.228,43.434 R97.1@83.944,43.434
NetP6_3: P6.3 R96.1 | length 18.7
  Component Side w0.254: v1(82.55,37.244) 82.55,28.499 83.617,27.432 84.582,27.432 P6.3@86.233,29.083
  Solder Side w0.254: v1(82.55,37.244) 83.99,38.684 83.99,41.698 R96.1@83.944,41.698
NetP6_4: P6.4 R95.1 | length 8.4
  Component Side w0.254: P6.4@88.773,29.083 89.721,30.031 89.916,30.031 90.17,30.285 90.17,32.661 v1(89.103,33.728)
  Solder Side w0.254: R95.1@87.122,32.255 87.63,32.255 v1(89.103,33.728)
NetP6_5: P6.5 R94.1 | length 1.9
  Solder Side w0.254: P6.5@91.313,29.083 91.313,28.335 91.632,28.016 R94.1@91.632,27.305
NetP6_6: P6.6 R93.1 | length 4.9
  Solder Side w0.254: R93.1@91.059,32.193 91.059,31.445 92.456,30.048 92.456,29.337 92.71,29.083 P6.6@93.853,29.083
NetP6_7: P6.7 R98.2 | length 5.9
  Solder Side w0.254: R98.2@92.773,32.193 92.773,30.48 93.027,30.226 94.378,30.226 95.521,29.083 P6.7@96.393,29.083
NetP6_8: P6.8 R99.2 | length 6
  Signal Layer 2 w0.254: v1(96.368,31.293) 96.368,30.874 98.158,29.083 P6.8@98.933,29.083
  Solder Side w0.254: R99.2@94.488,32.193 95.467,32.193 v1(96.368,31.293)
NetP6_9: P6.9 R100.2 | length 2
  Solder Side w0.254: P6.9@101.473,29.083 101.473,28.194 101.6,28.067 R100.2@101.6,27.178
NetP6_10: P6.10 R101.2 | length 8.8
  Component Side w0.254: v1(102.895,35.128) 104.292,33.731 104.292,30.901 104.013,30.621 P6.10@104.013,29.083
  Solder Side w0.254: R101.2@102.427,33.274 102.427,34.66 v1(102.895,35.128)
NetP6_11: P6.11 R104.2 | length 2.3
  Solder Side w0.254: R104.2@105.537,27.178 105.537,28.067 P6.11@106.553,29.083
NetP6_12: P6.12 R91.2 | length 9.7
  Component Side w0.254: v1(107.264,36.576) 107.264,30.912 P6.12@109.093,29.083
  Solder Side w0.254: R91.2@105.983,37.084 106.756,37.084 v1(107.264,36.576)
NetP6_13: P6.13 R92.2 | length 15.2
  Solder Side w0.254: R92.2@105.856,39.624 109.728,39.624 110.071,39.281 110.071,30.645 P6.13@111.633,29.083
NetP6_14: P6.14 R102.2 | length 1.9
  Solder Side w0.254: R102.2@114.173,27.178 P6.14@114.173,29.083
NetP6_15: P6.15 R103.2 | length 2.5
  Solder Side w0.254: P6.15@116.713,29.083 R103.2@119.188,29.083
NetP10_2: P10.2 U17.13 | length 126.5
  Component Side w0.254: v1(104.318,47.6) 108.68,43.238 125.317,43.238 130.505,38.049 130.505,27.051 130.81,26.746 149.936,26.746 151.765,28.575 156.273,28.575 156.337,28.639 156.337,31.674 158.242,33.579 158.242,41.351 156.413,43.18 156.413,48.285 156.667,48.539 156.667,62.636 162.865,68.834 162.865,74.473 P10.2@164.211,75.819
  Solder Side w0.254: U17.13@101.496,45.252 100.584,45.252 100.381,45.455 100.381,46.584 101.397,47.6 v1(104.318,47.6)
NetP10_3: P10.3 R113.1 U5.20 | length 64.9
  Signal Layer 1 w0.254: v1(119.971,60.166) 119.971,64.815 123.144,67.988 152.276,67.988 160.988,76.7 166.243,76.7 166.362,76.581 166.362,75.057 166.243,74.938 165.87,74.938 P10.3@165.481,74.549
  Solder Side w0.21: 118.923,61.214 v1(119.971,60.166) 121.631,58.506 U5.20@122.828,58.506
  Solder Side w0.254: R113.1@117.667,61.214 118.923,61.214
NetP10_4: P10.4 U17.1 | length 156.2
  Signal Layer 2 w0.254: v1(91.313,49.174) 91.313,55.765 92.698,57.15 92.698,61.049 93.599,61.951 93.599,80.442 102.108,88.951 104.902,88.951 105.258,89.306 105.258,93.726 104.826,94.158 104.826,101.651 109.855,106.68 145.44,106.68 146.888,105.232 146.888,102.362 147.193,102.057 151.308,102.057 152.984,100.381 152.984,94.615 154.407,93.193 154.407,90.907 149.987,86.487 149.987,82.982 150.368,82.601 160.35,82.601 162.001,80.95 162.001,76.759 P10.4@164.211,74.549
  Solder Side w0.254: v1(91.313,49.174) 91.796,48.691 U17.1@91.796,47.752
NetP10_5: P10.5 R114.1 U5.19 | length 63.6
  Signal Layer 2 w0.254: v1(125.781,57.074) 128.194,57.074 v1(142.062,70.942)
  Solder Side w0.21: 119.919,57.856 U5.19@122.828,57.856 124.999,57.856
  Solder Side w0.254: R114.1@117.667,59.372 118.402,59.372 119.919,57.856 ; 124.999,57.856 v1(125.781,57.074) ; v1(142.062,70.942) 153.964,70.942 156.026,73.004 160.274,73.004 160.655,73.385 160.655,76.556 161.036,76.937 166.116,76.937 166.37,76.683 166.37,74.168 P10.5@165.481,73.279
NetP10_6: P10.6 U17.17 | length 137.9
  Signal Layer 2 w0.254: v1(98.222,42.85) 96.774,41.402 93.269,41.402 93.015,41.148 93.015,39.091 93.472,38.633 94.996,38.633 96.291,39.929 97.434,39.929 97.739,39.624 97.739,38.1 97.993,37.846 99.746,37.846 100.787,38.887 104.064,38.887 104.343,38.608 104.343,37.211 111.328,30.226 112.522,30.226 113.03,29.718 113.03,28.194 113.284,27.94 140.411,27.94 142.215,29.743 147.752,29.743 149.911,31.902 153.645,31.902 158.775,37.033 165.938,37.033 166.243,37.338 166.243,48.514 165.862,48.895 163.068,48.895 162.306,49.657 162.306,71.374 P10.6@164.211,73.279
  Solder Side w0.254: v1(98.222,42.85) 99.02,42.052 U17.17@101.496,42.052
NetP10_7: P10.7 R115.1 U5.18 | length 83.4
  Signal Layer 1 w0.254: v1(113.614,60.35) 113.614,68.047 114.173,68.605 150.668,68.605 159.271,77.208 166.624,77.208 166.87,76.962 166.87,73.398 P10.7@165.481,72.009
  Solder Side w0.21: 119.153,57.206 U5.18@122.828,57.206
  Solder Side w0.254: v1(113.614,60.35) 113.614,57.836 114.757,56.693 117.348,56.693 117.667,57.012 R115.1@117.667,57.531 118.828,57.531 119.153,57.206
NetP10_8: P10.8 U17.28 | length 132.3
  Signal Layer 2 w0.254: v1(95.834,34.836) 95.834,32.766 96.139,32.461 99.568,32.461 99.898,32.131 99.898,29.972 100.33,29.54 100.33,26.645 100.736,26.238 151.384,26.238 151.587,26.035 158.877,26.035 161.595,28.753 166.421,28.753 169.418,31.75 169.418,51.054 168.91,51.562 163.068,51.562 162.814,51.816 162.814,70.612 P10.8@164.211,72.009
  Solder Side w0.254: U17.28@95.796,36.352 95.796,34.874 v1(95.834,34.836)
NetP10_9: P10.9 R116.1 U5.17 | length 61.6
  Signal Layer 1 w0.254: v1(124.79,55.804) 126.797,55.804 129.921,58.928 142.088,58.928 143.358,60.198 160.002,60.198 163.566,63.762 167.132,63.762 167.378,64.008 167.378,68.842 P10.9@165.481,70.739
  Solder Side w0.21: 118.068,56.556 U5.17@122.828,56.556 124.038,56.556 v1(124.79,55.804)
  Solder Side w0.254: R116.1@117.667,55.689 117.667,56.155 118.068,56.556
NetP10_10: P10.10 U17.39 | length 152.2
  Signal Layer 2 w0.254: v1(85.344,37.948) 86.208,37.948 89.637,41.377 89.637,45.593 89.357,45.872 85.344,45.872 85.09,46.126 85.09,48.539 83.134,50.495 83.134,53.34 83.388,53.594 86.716,53.594 86.97,53.34 86.97,50.927 89.738,48.158 93.574,48.158 93.929,48.514 93.929,50.394 95.439,51.903 95.439,61.794 94.945,62.288 94.945,65.532 95.25,65.837 99.72,65.837 105.943,72.06 108.864,72.06 109.83,71.095 v1(113.487,71.095)
  Solder Side w0.254: v1(85.344,37.948) 83.464,36.068 81.788,36.068 81.534,36.322 81.534,38.862 81.915,39.243 81.915,43.942 82.238,44.265 86.012,44.265 88.225,42.052 U17.39@90.096,42.052 ; v1(113.487,71.095) 115.316,69.266 153.507,69.266 156.737,72.496 162.454,72.496 P10.10@164.211,70.739
NetP10_11: P10.11 R117.1 U5.16 | length 67.7
  Signal Layer 1 w0.254: v1(118.821,54.61) 122.885,58.674 122.885,59.944 123.139,60.198 124.522,60.198 125.781,61.457 127.508,61.457 129.529,59.436 140.589,59.436 141.859,60.706 156.159,60.706 159.723,64.27 166.37,64.27 166.87,64.77 166.87,68.08 P10.11@165.481,69.469
  Solder Side w0.21: 120.752,55.906 U5.16@122.828,55.906
  Solder Side w0.254: v1(118.821,54.61) 118.567,54.356 117.667,54.356 R117.1@117.667,53.848 118.694,53.848 120.752,55.906